# Altium PCB STS_BASE.01.PcbDoc
Units mm, origin at the board's own origin, x right, y up, seen from the top; angles counter-clockwise.
Board outline 26.55 x 43.49 mm, 2 copper layers (Top Layer, Bottom Layer), stack 0.971 mm thick; 3 components, 5 nets, 11 pads, 2 vias.
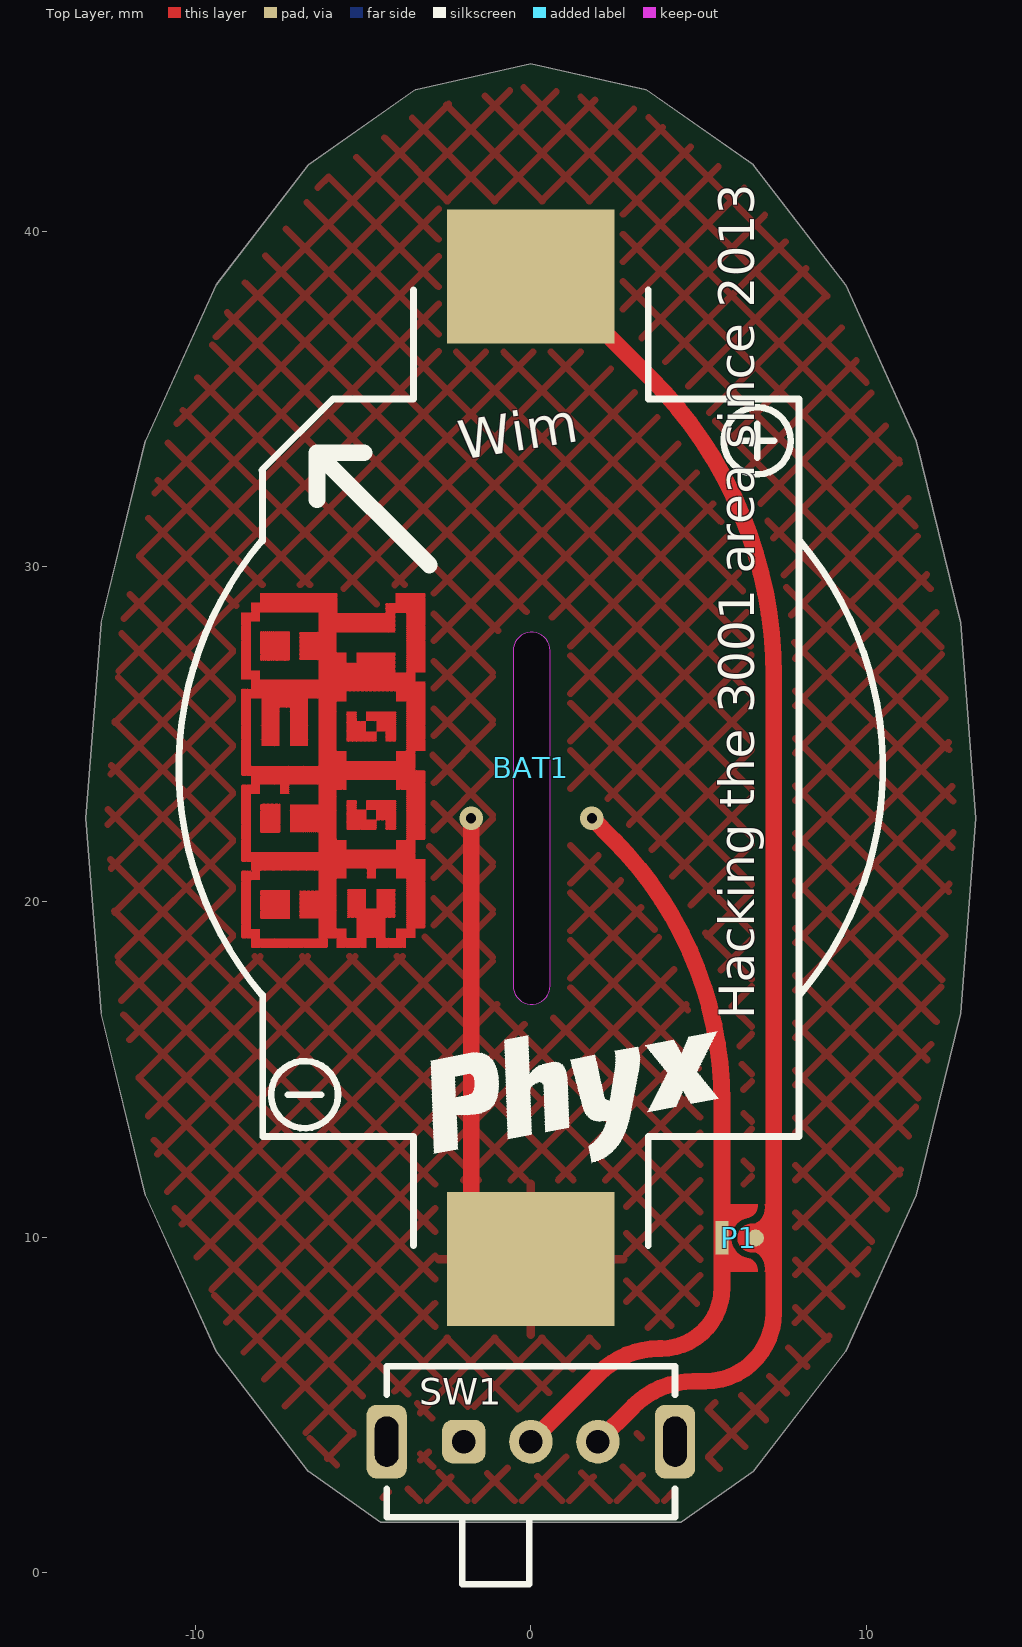
[diagram p0: Top Layer view]
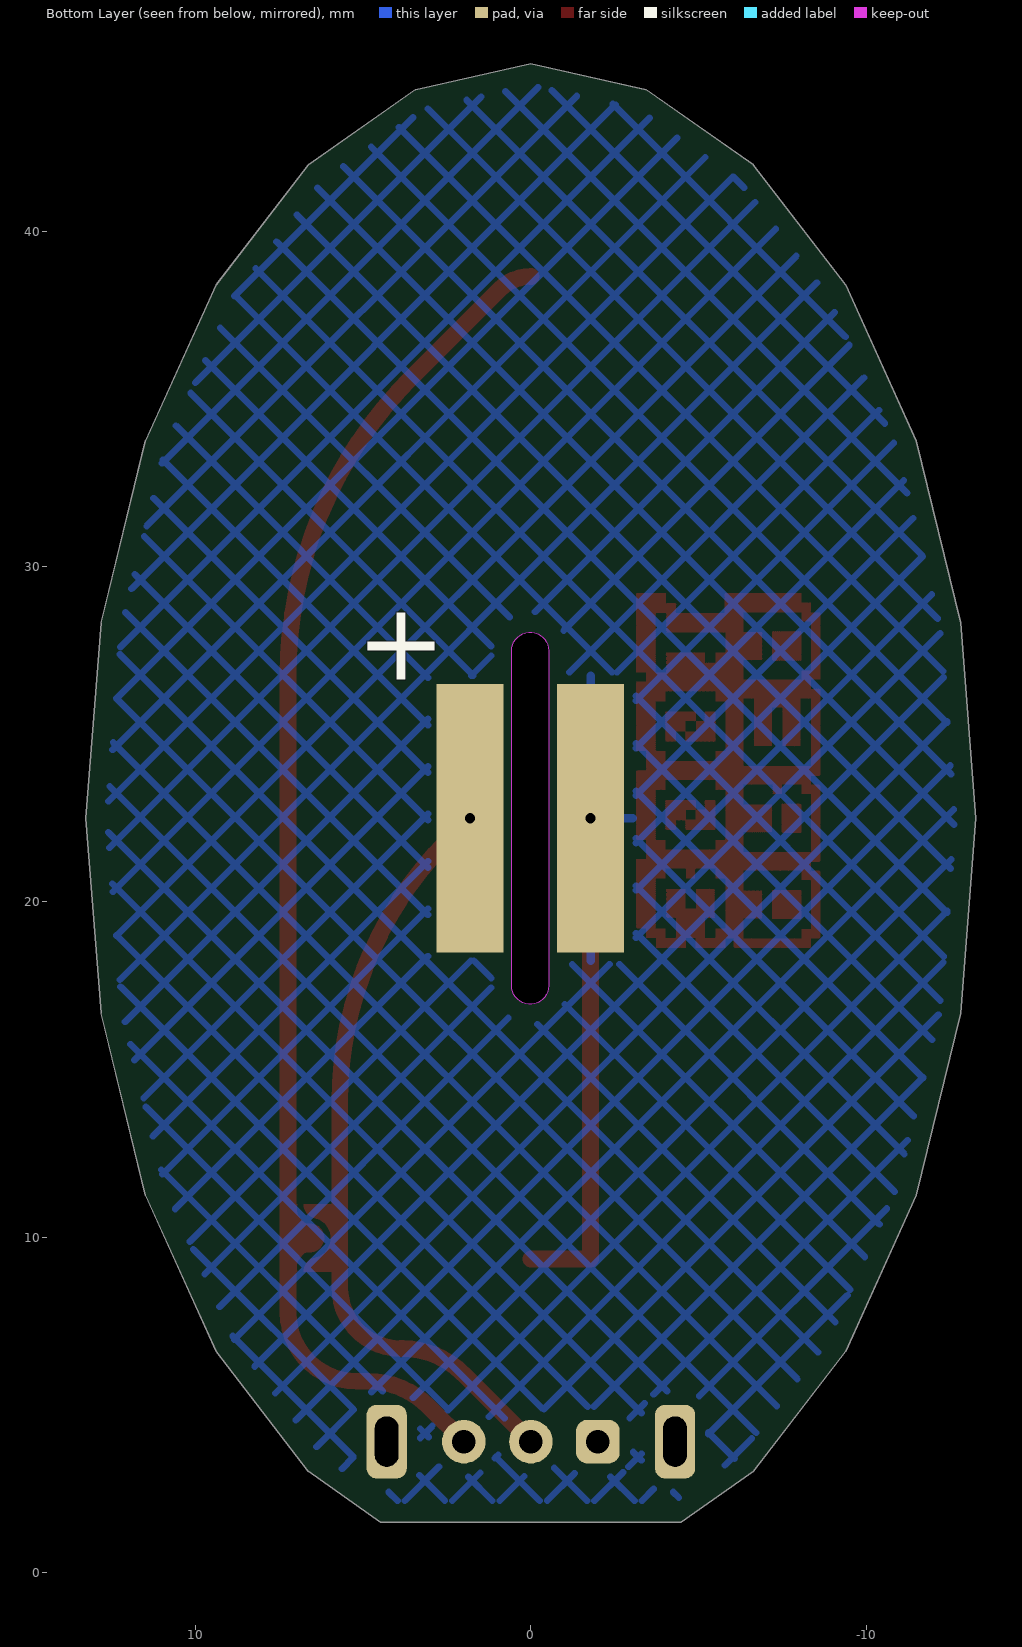
[diagram p1: Bottom Layer view, seen from below]

## Layer stack, top to bottom
Top Solder: solder mask 0.0102, Solder Resist, Dk 3.5
Top Layer: signal copper 0.0356
Dielectric1: core 0.9, FR-4, Dk 4.8
Bottom Layer: signal copper 0.0356
Bottom Solder: solder mask 0.0102, Solder Resist, Dk 3.5

## Board outline
-9.386,6.589 -11.495,11.248 -12.821,16.674 -13.273,22.497 -12.821,28.32 -11.495,33.745 -9.386,38.405 -6.637,41.98 -3.435,44.227 0,44.994 3.435,44.227 6.637,41.98 9.386,38.405 11.495,33.745 12.821,28.32 13.273,22.497 12.821,16.674 11.495,11.248 9.386,6.589 6.637,3.014 4.48,1.5 -4.48,1.5 -6.637,3.014
cut-out: -0.529,17.494 ccw(c0.021,17.494) 0.571,17.494 0.571,27.494 ccw(c0.021,27.494) -0.529,27.494

## Design rules (kind name [scope] priority, off if disabled: settings)
BoardOutlineClearance [NOT OnLayer('Top Overlay') AND NOT OnLayer('Bottom Overlay') AND NOT IsText] p1: gap=0.5 ignorepadtopadclearanceinfootprint=FALSE except(0: Arc-SplitContinuation Track-SplitContinuation SMDPad-SplitContinuation THPad-SplitContinuation Via-SplitContinuation Fill-SplitContinuation Poly-SplitContinuation Region-SplitContinuation Text-SplitContinuation)
Clearance [All] p1: gap=0.15 ignorepadtopadclearanceinfootprint=FALSE except(0: Arc-Hole Track-Hole SMDPad-Hole THPad-Hole Via-Hole Fill-Hole Poly-Hole Region-Hole Text-Hole; 0.3: Arc-Poly Track-Poly THPad-Poly Via-Poly Fill-Poly; 1.1: Poly-Poly)
DiffPairsRouting [All] p1: maxlimit=0.254 minlimit=0.254 mostfreqgap=0.254 toplayer_minwidth=0.2 toplayer_maxwidth=0.381 toplayer_prefwidth=0.381 bottomlayer_minwidth=0.2 bottomlayer_maxwidth=0.381 bottomlayer_prefwidth=0.381 maxuncoupledlength=12.7
HoleSize [All] p1: absolutevalues=TRUE maxlimit=10 minlimit=0.025 maxpercent=80.000 minpercent=20.000
PolygonConnect PolygonConnect_VIA [IsVia] p1: connectstyle=Direct reliefconductorwidth=0.254 reliefentries=4 polygonreliefangle="90 Angle" airgapwidth=0.254
PolygonConnect [All] p2: connectstyle=Relief reliefconductorwidth=0.254 reliefentries=4 polygonreliefangle="90 Angle" airgapwidth=0.254
RoutingVias [All] p1: holewidth=0.3 width=0.7 viastyle="Through Hole" minholewidth=0.3 minwidth=0.2 maxholewidth=0.6 maxwidth=1.2
SilkToSolderMaskClearance SilkscreenOverComponentPads [IsPad] p1: minsilkscreentomaskgap=0.254 clearancetoexposedcopper=TRUE
SolderMaskExpansion [All] p1: expansion=0.05 istentingtop=FALSE
Width [All] p1: maxlimit=5 minlimit=0.15 preferedwidth=0.25
27 further rules are at their usual default settings.

## Components (designator, comment, footprint, x,y, rotation, side; value= is the part's Value field where it differs from the comment)
BAT1 "CR2032 SMD Battery Holder" BAT_CR2032_KEY_1060 0,24 r90 top locked value=CR2032
P1 "Easy to solder connection" SOLDER_SW_V_1MM 6.7,9.975 r270 top value="NO BOM"
SW1 "mini Switch 1 pole double throw right angle" SK-12D07 0,3.9 r0 top value=SK-12D07

## Footprints (in the part's own frame and the unit in brackets; to place one, negate y for a bottom-side part, rotate by r counter-clockwise, add the part's x,y. Pads: shape width x height; smd on the part's side, far side on the other; paste and mask are expansions set on the pad)
BAT_CR2032_KEY_1060 [mm]
  rect 4x5 smd: 1(14.655,0) 2(-14.655,0)
  silkscreen extent -14.25,-10.5 14.25,10.5, body extent -15.81,-8.06 16.02,7.94, height 5.7
SK-12D07 [mm] "SWITCH, SPDT, THT, RA"
  rrect50% 1.2x2.2 hole 0.7 slot 1.5 at 90 deg: 0(-4.3,0) 0(4.3,0)
  rrect50% 1.3x1.3 hole 0.7: 1(-2,0)
  round 1.3 hole 0.7: 2(0,0) 3(2,0)
  silkscreen extent -4.3,-4.25 4.3,2.25, body extent -4.3,-4.25 4.3,2.25, height 4.7
SOLDER_SW_V_1MM [mm] "1 mm Custom solder switch"
  round 0.5 smd mask+0.05: 1(0,0)
  rect 1x0.4 smd mask+0.05: 2(0,-1)
  Top Layer region: -1.01,0.275 -1.01,0.6 1,0.6 1,0.275 0.767,0.269 0.56,0.162 0.42,-0.025 0.42,-0.025 0.408,-0.239 0.294,-0.42 0.107,-0.524 -0.107,-0.524 -0.294,-0.42 -0.408,-0.239 -0.42,-0.025 -0.42,-0.025 -0.563,0.163 -0.773,0.271 -1.01,0.275
  Top Layer region: -1,-1.2 -1,-0.7 -1,0.074 -0.831,0.043 -0.69,-0.054 -0.6,-0.2 -0.6,-0.2 -0.497,-0.47 -0.28,-0.661 0,-0.73 0.28,-0.661 0.497,-0.47 0.6,-0.2 0.6,-0.2 0.69,-0.054 0.832,0.043 1,0.074 1,0.074 1,-0.7 1,-1.2

## Part data
BAT1: library part "BAT # 20mm Coin Cell Holder Keystone 1060", "=Description", Supplier Part Number 1=36-1060-ND, Supplier 1=Digi-key, Supplier 2=Aliexpress
P1: library part "SOLDER SW V 1MM"
SW1: library part "SW 1P2T micro RA SK-12D07", Supplier Part Number 1=SK-12D07, Supplier 1=AliExpress

## Free pads (board coordinates)
  rect 2x8 smd far side: 0(-1.779,22.494) 0(1.821,22.494)

## Via types
v1: diameter 0.7, hole 0.3, Top Layer to Bottom Layer, tented top, 2 vias

## Nets (pads, with @x,y where several pads share a name; then routed paths per layer and width w, separated by ;. In a path a pad name is that pad's centre, name@x,y a point inside that pad or via, vN(x,y) a via of type N, cw(c..) or ccw(c..) an arc to the next point about the centre after c; other vN are vias at no path point)
ANODE: 
CATHODE: 
GND: BAT1.2 pad.0@-1.779,22.494 | length 14.9
  Top Layer w0.5: v1(-1.779,22.494) -1.779,9.345 BAT1.2
VBAT: BAT1.1 P1.1 SW1.3 | length 41.2
  Top Layer w0.5: BAT1.1 cw(c0,37.339) 0.93,38.27 3.556,35.644 cw(c-5.342,26.746) 7.242,26.746 7.242,7.747 cw(c5.195,7.747) 5.195,5.7 4.852,5.7 ccw(c4.852,3.16) 3.056,4.956 SW1.3 ; P1.1 7.242,9.975
VLED: P1.2 pad.0@1.821,22.494 SW1.2 | length 22.9
  Top Layer w0.5: SW1.2 2.031,5.931 cw(c3.827,4.135) 3.827,6.675 3.878,6.675 ccw(c3.878,8.497) 5.7,8.497 P1.2 5.7,14.027 ccw(c-5.376,14.027) 2.456,21.858 v1(1.821,22.494)
pads on no net: SW1.0 SW1.1

## Polygon pours and split planes (outlines as drawn)
GND on Bottom Layer "B_G" (hatched 45Degree grid 1 track 0.2, remove dead copper, pour order 1): 14.021,44.994 -13.479,44.994 -13.479,-0.006 14.021,-0.006
GND on Top Layer "T_G" (hatched 45Degree grid 1 track 0.2, remove dead copper, pour order 0): -13.479,44.994 13.273,44.994 13.273,-0.006 -13.479,-0.006

## Other copper
Top Layer:
  region: 338 vertices and 0 holes, not listed, extent -8.064,27.192 -7.198,28.073
  region: 333 vertices and 0 holes, not listed, extent -8.064,22.06 -7.477,22.926
  region: 285 vertices and 0 holes, not listed, extent -8.064,19.494 -7.198,20.344
  region: 501 vertices and 1 holes, not listed, extent -5.514,24.78 -4.014,25.677
  region: 585 vertices and 0 holes, not listed, extent -5.514,22.153 -4.014,23.034
  region: 4134 vertices and 10 holes, not listed, extent -8.636,18.629 -3.149,29.201

## Silkscreen, mask and mechanical layers (free items; w line width, h text height)
Top Overlay:
  drawing of 8 lines, arcs and shapes, not listed
  text "Wim" at -2,32.8 h2 r9
  text "Hacking the 3001 area since 2013" at 7,16.5 h1.8 r90
Bottom Overlay:
  text "+" at 2.529,25.861 h4
Top Solder:
  region: -0.717,30.831
  region: -3.155,29.218
  region: 7.317,26.561
  region: -5.244,29.555
Outline:
  lines w0.1: -13.273,22.497 -12.821,16.674 -11.495,11.248 -9.386,6.589 -6.637,3.014 -4.48,1.5 4.48,1.5 6.637,3.014 9.386,6.589 11.495,11.248 12.821,16.674 13.273,22.497 12.821,28.32 11.495,33.745 9.386,38.405 6.637,41.98 3.435,44.227 0,44.994 -3.435,44.227 -6.637,41.98 -9.386,38.405 -11.495,33.745 -12.821,28.32 -13.273,22.497 ; -0.529,17.494 ccw(c0.021,17.494) 0.571,17.494 0.571,27.494 ccw(c0.021,27.494) -0.529,27.494 -0.529,17.494

## Dimensions
-13.273,22.497 to 13.273,22.497 on Fabrication
4.48,1.5 to 0,44.994 on Fabrication

## Text inside footprints (layer, text, board x,y; h text height)
BAT1: Comments "Adhesive" at 1.75,21.5 h0.8 r123.11; Comments "+UP" at -2.8,14.5 h2; Assembly Top "BATTERY" at -2.91,18.5 h1.5 r90